# EAGLE board Proiect_TSC_BOARD (EAGLE 9.7.0)
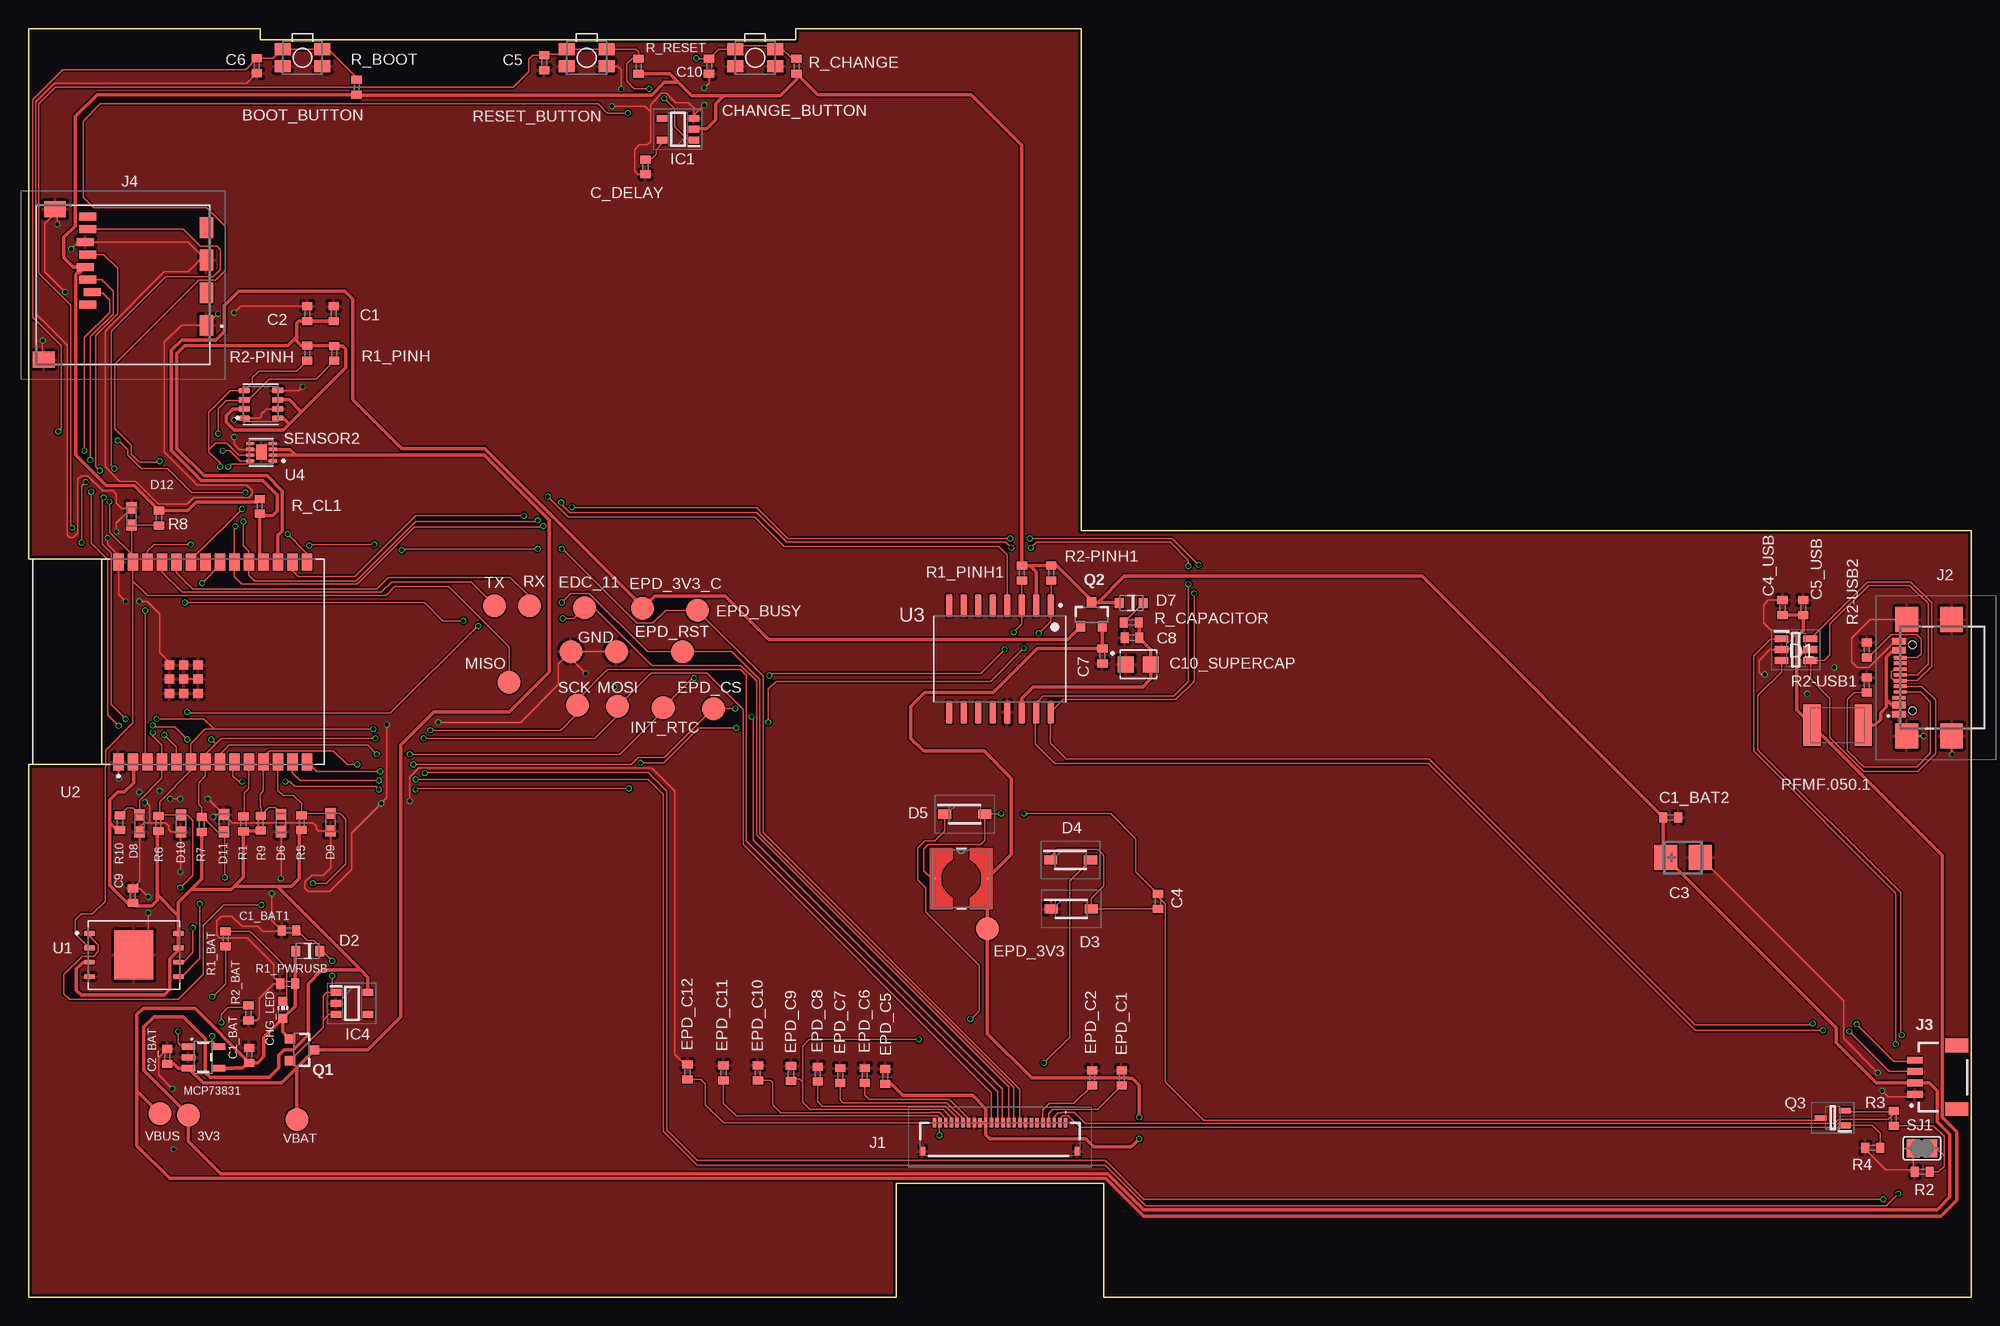
[diagram p0: board, top side]
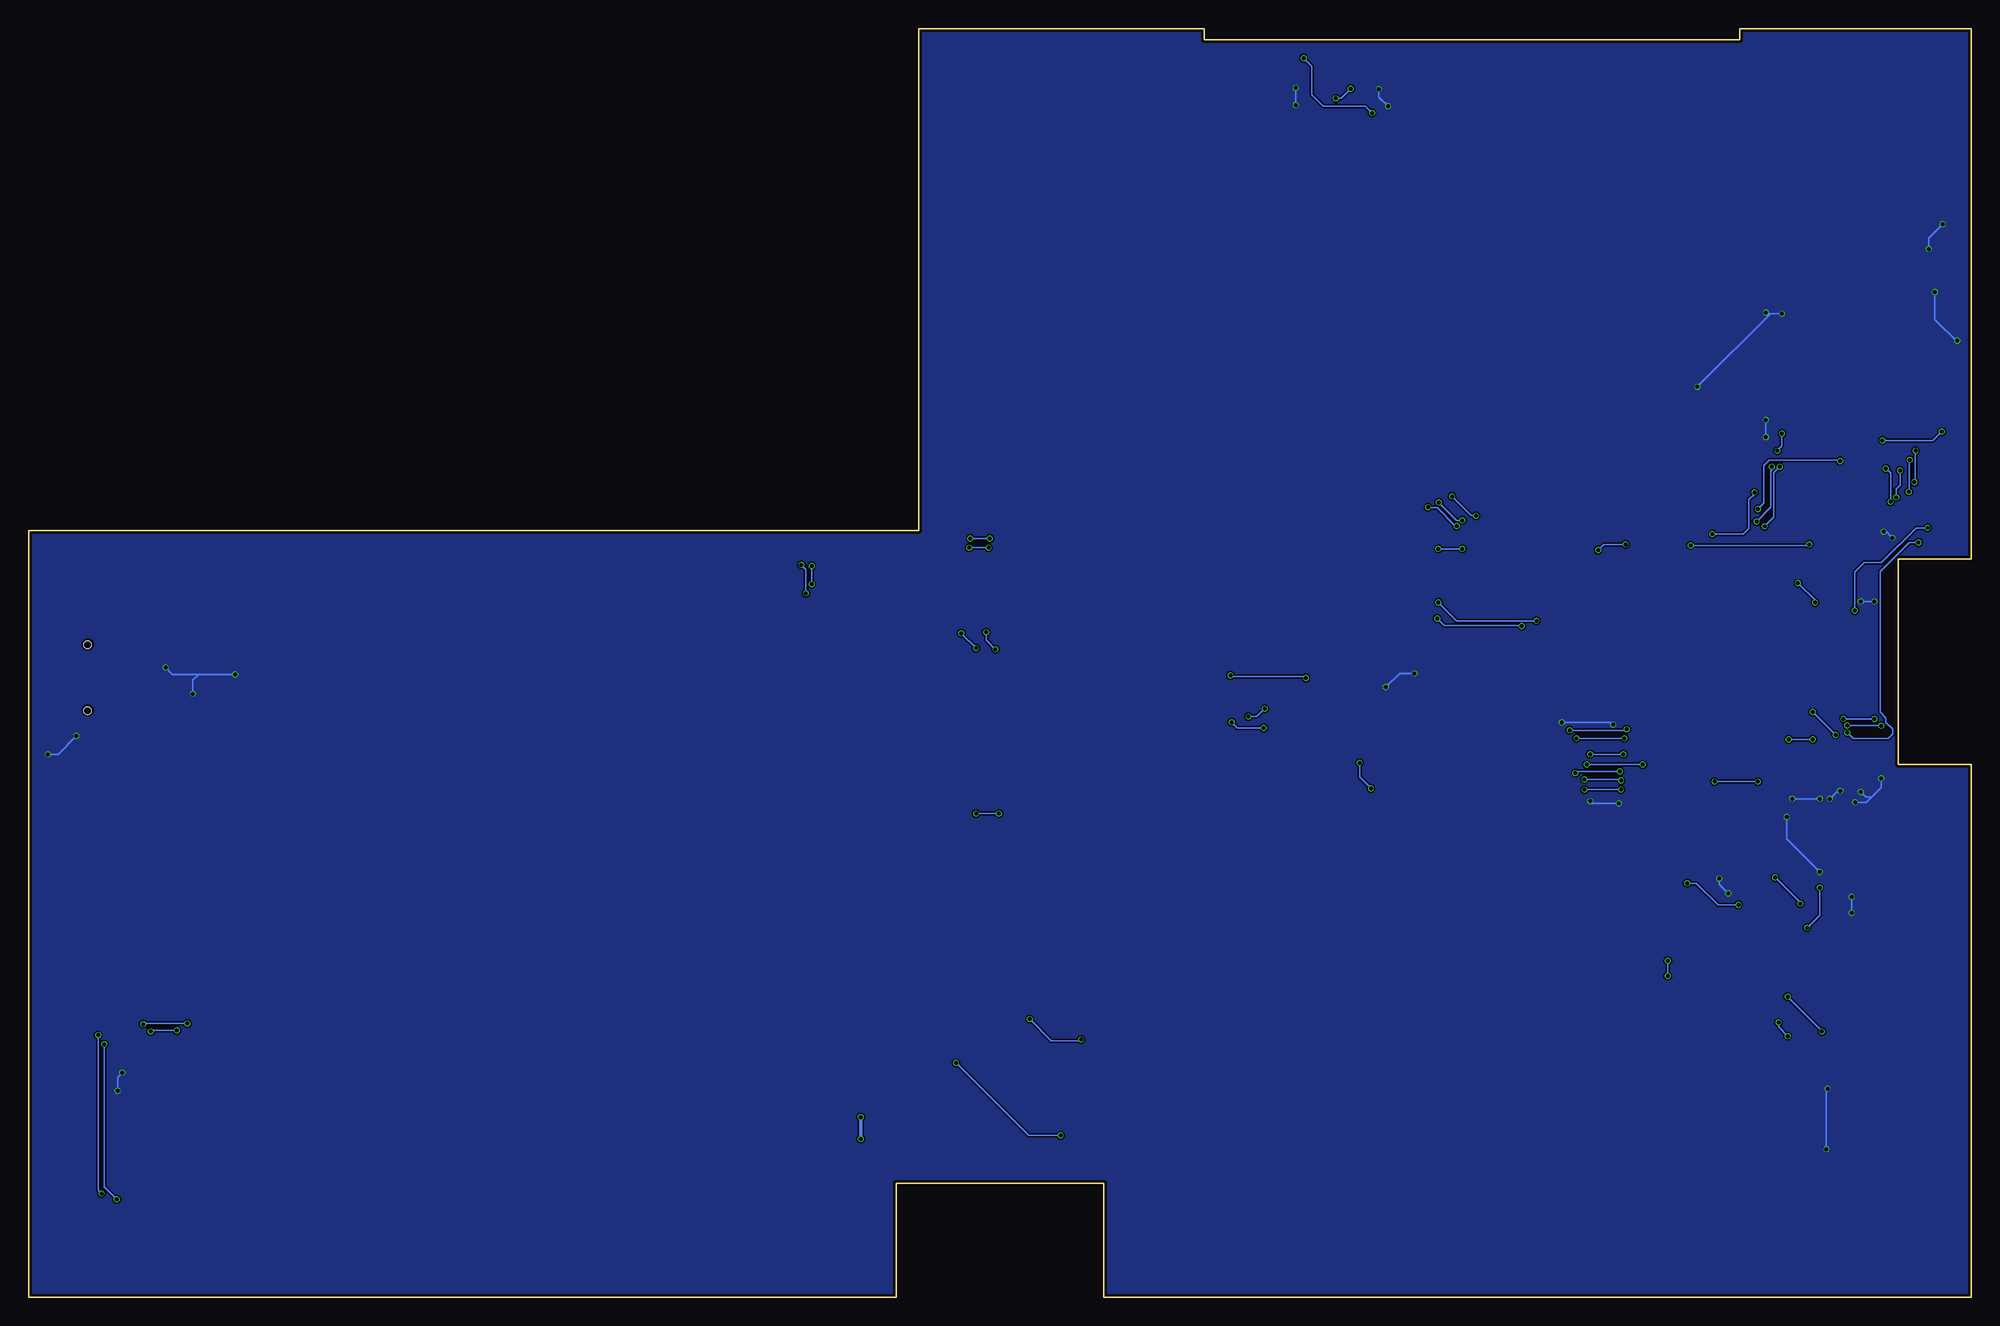
[diagram p1: board, bottom side, seen from below]

Size 170.2 x 111.2 mm. Coordinates in mm from the lower left corner, seen from the top.
Outline: 0,111.2 20.3,111.2 20.3,110.2 67.2,110.2 67.2,111.2 92.2,111.2 92.2,67.2 170.2,67.2 170.2,0 94.2,0 94.2,10 76,10 76,0 0,0 0,46.7 6.4,46.7 6.4,64.7 0,64.7 0,111.2
Copper layers (1*16): Top 0.035mm / dielectric 1.6mm / Bottom 0.035mm
Design rules "jlcpcb-2layers.dru *": minimum track width 5mil, minimum drill 0.3mm, track to track 5mil, track to pad 5mil, pad to pad 5mil, via to via 5mil, smd to smd 5mil, copper to edge 0.2mm, drill to drill 6mil, minimum pad ring 10mil, minimum via ring 3mil, stop-mask expansion 4mil, vias tented up to drill 0mil, thermal gap 10mil

## Footprints (pad centres in the part's own frame; a part is rotated, then mirrored left to right if it is on the bottom)
TP20R = smd 2 x 2: TP 0,0
MYBUTTON = smd 1.4 x 1.05: 1 1.75,0.75; 2 -1.75,0.75; 3 -1.75,-0.75; 4 1.75,-0.75
ESP32_WROVER_EAGLE-LTSPICE_C0402 = smd 0.7 x 0.9: 1 -0.65,0; 2 0.65,0
RCL_CT3528 = smd 2 x 2.2: + -1.5,0; - 1.5,0
EAGLE-LTSPICE_C0402 = smd 0.7 x 0.9: 1 -0.65,0; 2 0.65,0
CAPCP3225X100N = smd 1.4 x 1.4: 1 -1.1,0; 2 1.1,0
ADAFRUIT_CHIP-LED0603 = smd 0.8 x 0.8: A 0,-0.75; C 0,0.75
SOT95P280X145-6N = smd 1.2 x 0.6: 1 -1.25,0.95; 2 -1.25,0; 3 -1.25,-0.95; 4 1.25,-0.95; 5 1.25,0; 6 1.25,0.95
ESP32_WROVER_AVX---SD0805S020S1R0_AVX_SD0805S020S1R0_0 = smd 0.8 x 0.9: 1 -1.05,0; 2 1.05,0
SOD3716X135N = smd 1.15 x 0.8: 1 -1.75,0; 2 1.75,0
DIOC1608X36N = smd 0.97 x 0.94: 1 -0.75,0; 2 0.75,0
SOT95P280X125-5N = smd 0.9 x 0.6: 1 -1.4,0.95; 2 -1.4,0; 3 -1.4,-0.95; 4 1.4,-0.95; 5 1.4,0.95
SOT95P280X120-5N = smd 0.9 x 0.6: 1 -1.4,0.95; 2 -1.4,0; 3 -1.4,-0.95; 4 1.4,-0.95; 5 1.4,0.95
FH34SRJ24S05SH99 = smd 0.3 x 0.8: 1 5.75,1.45; 2 5.25,1.45; 3 4.75,1.45; 4 4.25,1.45; 5 3.75,1.45; 6 3.25,1.45; 7 2.75,1.45; 8 2.25,1.45; 9 1.75,1.45; 10 1.25,1.45; 11 0.75,1.45; 12 0.25,1.45; 13 -0.25,1.45; 14 -0.75,1.45; 15 -1.25,1.45; 16 -1.75,1.45; 17 -2.25,1.45; 18 -2.75,1.45; 19 -3.25,1.45; 20 -3.75,1.45; 21 -4.25,1.45; 22 -4.75,1.45; 23 -5.25,1.45; 24 -5.75,1.45 | smd 0.4 x 0.8: MP1 6.75,-1.05; MP2 -6.75,-1.05
SAMACSYS_PARTS_USB4110GFA = smd 0.3 x 1.143: A1 -3.35,3.778; A4 -2.55,3.778; A5 -1.25,3.678; A6 -0.25,3.678; A7 0.25,3.678; A8 1.25,3.678; A9 2.55,3.778; A12 3.35,3.778; B1 3.05,3.778; B4 2.25,3.778; B5 1.75,3.678; B6 0.75,3.678; B7 -0.75,3.678; B8 -1.75,3.778; B9 -2.25,3.778; B12 -3.05,3.778 | smd 2.18 x 2: MP1 -5.11,-0.827; MP2 5.11,-0.827; MP3 -5.11,3.103; MP4 5.11,3.103 | hole 0.65: -2.89,2.603; 2.89,2.603
JST04_1MM_RA = smd 0.6 x 1.35: 1 -1.5,0; 2 -0.5,0; 3 0.5,0; 4 1.5,0 | smd 1.2 x 2: NC1 2.8,-3.675; NC2 -2.8,-3.675
112ATAARR03ATTEND = smd 1.8 x 1.2: G1 10.6,10.4; G2 4.9,10.4; S1 7.75,10.4; S2 2.05,10.4 | smd 1.4 x 1.9: G3 13.6,-3.85; G4 0.45,-2.85 | smd 0.7 x 1.5: P1 8.8,0; P2 7.7,0.4; P3 6.6,0; P4 5.5,-0.2; P5 4.4,0; P6 3.3,-0.2; P7 2.2,0; P8 1.1,0
IND_4828-WE-TPC_WRE = smd 0.127 x 0.127: 1 -2.286,0; 2 2.286,0
ESP32_WROVER_SPARKFUN-IC-POWER_SOT23-5 = smd 0.55 x 1.2: 1 -0.95,-1.3; 2 0,-1.3; 3 0.95,-1.3; 4 0.95,1.3; 5 -0.95,1.3
ESP32C6_VARISTOR_CT/CN1812 = smd 1.5 x 3.6: 1 -2.25,0; 2 2.25,0
ESP32_WROVER_SPARKFUN-DISCRETESEMI_SOT23-3 = smd 0.8 x 0.9: 1 -0.95,-1; 2 0.95,-1; 3 0,1.1
SOT65P210X110-3N = smd 1.05 x 0.5: 1 -1.05,0.65; 2 -1.05,-0.65; 3 1.05,0
ESP32_WROVER_EAGLE-LTSPICE_R0402 = smd 0.7 x 0.9: 1 -0.65,0; 2 0.65,0
ESP32_WROVER_BME680_PSON80P300X300X100-8N = smd 1.016 x 0.5: 1 1.458,1.2; 2 1.458,0.4; 3 1.458,-0.4; 4 1.458,-1.2; 5 -1.458,-1.22; 6 -1.458,-0.4; 7 -1.458,0.4; 8 -1.458,1.2
SJ = smd 1.168 x 1.6: 1 -0.762,0; 2 0.762,0
SON127P600X800X80-9N = smd 0.94 x 0.44: 1 -3.895,1.905; 2 -3.895,0.635; 3 -3.895,-0.635; 4 -3.895,-1.905; 5 3.895,-1.905; 6 3.895,-0.635; 7 3.895,0.635; 8 3.895,1.905 | smd 3.4 x 4.3: 9 0,0
XCVR_ESP32-C6-WROOM-1-N8 = smd 1.5 x 0.9: 1 -8.75,5.26; 2 -8.75,3.99; 3 -8.75,2.72; 4 -8.75,1.45; 5 -8.75,0.18; 6 -8.75,-1.09; 7 -8.75,-2.36; 8 -8.75,-3.63; 9 -8.75,-4.9; 10 -8.75,-6.17; 11 -8.75,-7.44; 12 -8.75,-8.71; 13 -8.75,-9.98; 14 -8.75,-11.25; 15 8.75,-11.25; 16 8.75,-9.98; 17 8.75,-8.71; 18 8.75,-7.44; 19 8.75,-6.17; 20 8.75,-4.9; 21 8.75,-3.63; 22 8.75,-2.36; 23 8.75,-1.09; 24 8.75,0.18; 25 8.75,1.45; 26 8.75,2.72; 27 8.75,3.99; 28 8.75,5.26 | smd 0.8 x 0.8: 29_1 -2.755,0.79; 29_2 -1.505,0.79; 29_3 -0.255,0.79; 29_4 -2.755,-0.46; 29_5 -1.505,-0.46; 29_6 -0.255,-0.46; 29_7 -2.755,-1.71; 29_8 -1.505,-1.71; 29_9 -0.255,-1.71
SOIC127P1032X265-16N = smd 2.05 x 0.59: 1 -4.655,4.445; 2 -4.655,3.175; 3 -4.655,1.905; 4 -4.655,0.635; 5 -4.655,-0.635; 6 -4.655,-1.905; 7 -4.655,-3.175; 8 -4.655,-4.445; 9 4.655,-4.445; 10 4.655,-3.175; 11 4.655,-1.905; 12 4.655,-0.635; 13 4.655,0.635; 14 4.655,1.905; 15 4.655,3.175; 16 4.655,4.445
SON50P200X200X80-9N = smd 0.76 x 0.27: 1 -0.985,0.75; 2 -0.985,0.25; 3 -0.985,-0.25; 4 -0.985,-0.75; 5 0.985,-0.75; 6 0.985,-0.25; 7 0.985,0.25; 8 0.985,0.75 | smd 0.9 x 1.3: 9 0,0

## Placement (x,y rotation side)
3V3  TPTP20R  [TP20R]  14,16 0 top
BOOT_BUTTON  BUTTON_CUSYOMV1  [MYBUTTON]  24,108.65 180 top
C1  100nF  [ESP32_WROVER_EAGLE-LTSPICE_C0402]  26.73,86.23 90 top
C1_BAT  4.7uF  [ESP32_WROVER_EAGLE-LTSPICE_C0402]  19.34,21.23 90 top
C1_BAT1  4.7uF  [ESP32_WROVER_EAGLE-LTSPICE_C0402]  22.81,32.17 180 top
C1_BAT2  4.7uF  [ESP32_WROVER_EAGLE-LTSPICE_C0402]  143.85,42.07 0 top
C2  100nF  [ESP32_WROVER_EAGLE-LTSPICE_C0402]  24.41,86.23 90 top
C2_BAT  4.7uF  [ESP32_WROVER_EAGLE-LTSPICE_C0402]  12.15,21.13 90 top
C3  100uF  [RCL_CT3528]  144.93,38.55 0 top
C4  4.7uF/25V  [ESP32_WROVER_EAGLE-LTSPICE_C0402]  98.94,34.71 90 top
C4_USB  100nF  [EAGLE-LTSPICE_C0402]  153.65,60.45 90 top
C5  1uF  [ESP32_WROVER_EAGLE-LTSPICE_C0402]  45.17,108.21 270 top
C5_USB  4.7uF  [EAGLE-LTSPICE_C0402]  155.46,60.45 90 top
C6  100nF  [ESP32_WROVER_EAGLE-LTSPICE_C0402]  19.99,107.93 270 top
C7  10uF  [ESP32_WROVER_EAGLE-LTSPICE_C0402]  94.07,56.21 270 top
C8  100nF  [ESP32_WROVER_EAGLE-LTSPICE_C0402]  96.66,57.81 180 top
C9  100nF  [ESP32_WROVER_EAGLE-LTSPICE_C0402]  9.14,35.21 90 top
C10  100nF  [ESP32_WROVER_EAGLE-LTSPICE_C0402]  59.62,107.91 270 top
C10_SUPERCAP  CPH3225A  [CAPCP3225X100N]  97.22,55.47 0 top
C_DELAY  100nF  [ESP32_WROVER_EAGLE-LTSPICE_C0402]  54.04,99.07 270 top
CHANGE_BUTTON  CHANGE_BUTTON  [MYBUTTON]  63.65,108.65 180 top
CHG_LED  [ADAFRUIT_CHIP-LED0603]  22.28,25.2 0 top
D1  USBLC6-2SC6Y  [SOT95P280X145-6N]  154.82,56.77 0 top
D2  ESP32_WROVER_AVX---SD0805S020S1R0_AVX_SD0805S020S1R0_0_0AVX_SD0805S020S1R0_0_0  [ESP32_WROVER_AVX---SD0805S020S1R0_AVX_SD0805S020S1R0_0]  24.45,30.36 180 top
D3  MBR0530  [SOD3716X135N]  91.34,34.05 0 top
D4  MBR0530  [SOD3716X135N]  91.28,38.35 0 top
D5  MBR0530  [SOD3716X135N]  82.02,42.35 0 top
D6  PGB1010603MR  [DIOC1608X36N]  22.12,41.57 90 top
D7  SD0805S020S1R0  [ESP32_WROVER_AVX---SD0805S020S1R0_AVX_SD0805S020S1R0_0]  96.6,60.86 180 top
D8  PGB1010603MR  [DIOC1608X36N]  9.72,41.55 90 top
D9  PGB1010603MR  [DIOC1608X36N]  26.46,41.65 90 top
D10  PGB1010603MR  [DIOC1608X36N]  13.35,41.54 90 top
D11  PGB1010603MR  [DIOC1608X36N]  17.12,41.56 270 top
D12  PGB1010603MR  [DIOC1608X36N]  9.03,68.45 270 top
EDC_11  TPTP20R  [TP20R]  48.7,60.43 0 top
EPD_3V3  TPTP20R  [TP20R]  84,32.3 0 top
EPD_3V3_C  TPTP20R  [TP20R]  53.8,60.4 0 top
EPD_BUSY  TPTP20R  [TP20R]  58.6,60.2 0 top
EPD_C1  1uF/50V  [ESP32_WROVER_EAGLE-LTSPICE_C0402]  95.77,19.25 89.9 top
EPD_C2  1uF/50V  [ESP32_WROVER_EAGLE-LTSPICE_C0402]  93.18,19.25 90 top
EPD_C5  0.1uF/50V  [ESP32_WROVER_EAGLE-LTSPICE_C0402]  75.05,19.39 270 top
EPD_C6  1uF/50V  [ESP32_WROVER_EAGLE-LTSPICE_C0402]  73.25,19.45 90 top
EPD_C7  1uF/50V  [ESP32_WROVER_EAGLE-LTSPICE_C0402]  71.1,19.45 89.8 top
EPD_C8  1uF/50V  [ESP32_WROVER_EAGLE-LTSPICE_C0402]  69.13,19.57 90 top
EPD_C9  1uF/50V  [ESP32_WROVER_EAGLE-LTSPICE_C0402]  66.79,19.63 90.4 top
EPD_C10  1uF/50V  [ESP32_WROVER_EAGLE-LTSPICE_C0402]  63.89,19.67 90 top
EPD_C11  1uF/50V  [ESP32_WROVER_EAGLE-LTSPICE_C0402]  60.88,19.7 90 top
EPD_C12  1uF/50V  [ESP32_WROVER_EAGLE-LTSPICE_C0402]  57.73,19.77 90 top
EPD_CS  TPTP20R  [TP20R]  60,51.6 0 top
EPD_RST  TPTP20R  [TP20R]  57.3,56.6 0 top
GND  TPTP20R  [TP20R]  51.5,56.6 0 top
IC1  BD5229G-TR  [SOT95P280X125-5N]  56.89,102.37 180 top
IC4  XC6220A331MR-G  [SOT95P280X120-5N]  28.33,25.77 0 top
INT_RTC  TPTP20R  [TP20R]  55.6,51.7 0 top
J1  FH34SRJ-24S-0.5SH_99_  [FH34SRJ24S05SH99]  85.1,13.87 0 top
J2  SAMACSYS_PARTS_USB4110-GF-A  [SAMACSYS_PARTS_USB4110GFA]  167.63,54.31 90 top
J3  QWIIC_RIGHT_ANGLE  [JST04_1MM_RA]  165.25,19.3 90 top
J4  112A-TAAR-R03_ATTEND  [112ATAARR03ATTEND]  5.18,95.8 270 top
L1  68uH  [IND_4828-WE-TPC_WRE]  81.71,36.7 0 top
MCP73831  MCP73831  [ESP32_WROVER_SPARKFUN-IC-POWER_SOT23-5]  15.31,21.04 270 top
MISO  TPTP20R  [TP20R]  42.1,53.9 0 top
MOSI  TPTP20R  [TP20R]  51.6,51.8 0 top
PFMF.050.1  ESP32C6_VARISTORCN1812  [ESP32C6_VARISTOR_CT/CN1812]  158.48,50.15 180 top
Q1  20V/4.2A/52mΩ/1.4W  [ESP32_WROVER_SPARKFUN-DISCRETESEMI_SOT23-3]  23.9,21.71 270 top
Q2  20V/4.2A/52mΩ/1.4W  [ESP32_WROVER_SPARKFUN-DISCRETESEMI_SOT23-3]  93.12,59.81 0 top
Q3  SI1308EDL-T1-GE3  [SOT65P210X110-3N]  158.05,15.73 180 top
R1  10K  [ESP32_WROVER_EAGLE-LTSPICE_R0402]  18.83,41.51 270 top
R1_BAT  200  [ESP32_WROVER_EAGLE-LTSPICE_R0402]  17.26,31.43 270 top
R1_PINH  10K  [ESP32_WROVER_EAGLE-LTSPICE_R0402]  26.79,82.73 90 top
R1_PINH1  10K  [ESP32_WROVER_EAGLE-LTSPICE_R0402]  87.02,63.49 90 top
R1_PWRUSB  100K  [ESP32_WROVER_EAGLE-LTSPICE_R0402]  22.71,27.49 0 top
R2  2.2  [ESP32_WROVER_EAGLE-LTSPICE_R0402]  165.89,11.01 0 top
R2-PINH  10K  [ESP32_WROVER_EAGLE-LTSPICE_R0402]  24.42,82.75 90 top
R2-PINH1  10K  [ESP32_WROVER_EAGLE-LTSPICE_R0402]  89.58,63.49 90 top
R2-USB1  5k1  [ESP32_WROVER_EAGLE-LTSPICE_R0402]  161.03,53.67 270 top
R2-USB2  5k1  [ESP32_WROVER_EAGLE-LTSPICE_R0402]  161.02,56.75 90 top
R2_BAT  2K  [ESP32_WROVER_EAGLE-LTSPICE_R0402]  19.27,24.93 90 top
R3  0.47  [ESP32_WROVER_EAGLE-LTSPICE_R0402]  163.39,15.71 90 top
R4  10K  [ESP32_WROVER_EAGLE-LTSPICE_R0402]  161.55,13.11 0 top
R5  10K  [ESP32_WROVER_EAGLE-LTSPICE_R0402]  23.92,41.61 270 top
R6  10K  [ESP32_WROVER_EAGLE-LTSPICE_R0402]  11.37,41.55 270 top
R7  10K  [ESP32_WROVER_EAGLE-LTSPICE_R0402]  15.17,41.46 270 top
R8  10K  [ESP32_WROVER_EAGLE-LTSPICE_R0402]  11.43,68.31 90 top
R9  10K  [ESP32_WROVER_EAGLE-LTSPICE_R0402]  20.35,41.57 270 top
R10  10K  [ESP32_WROVER_EAGLE-LTSPICE_R0402]  8.01,41.61 270 top
R_BOOT  10K  [ESP32_WROVER_EAGLE-LTSPICE_R0402]  28.74,106.05 270 top
R_CAPACITOR  15  [ESP32_WROVER_EAGLE-LTSPICE_R0402]  96.59,59.15 180 top
R_CHANGE  10K  [ESP32_WROVER_EAGLE-LTSPICE_R0402]  67.28,107.89 270 top
R_CL1  10K  [ESP32_WROVER_EAGLE-LTSPICE_R0402]  20.25,69.33 90 top
R_RESET  10K  [ESP32_WROVER_EAGLE-LTSPICE_R0402]  53.44,107.89 270 top
RESET_BUTTON  BUTTON_CUSYOMV1  [MYBUTTON]  48.9,108.65 180 top
RX  TPTP20R  [TP20R]  43.9,60.6 0 top
SCK  TPTP20R  [TP20R]  48.1,51.9 0 top
SENSOR2  BME688  [ESP32_WROVER_BME680_PSON80P300X300X100-8N]  20.36,78.27 180 top
SJ1  0  [SJ]  165.86,13.07 0 top
TP5  TPTP20R  [TP20R]  47.5,56.6 0 top
TX  TPTP20R  [TP20R]  40.8,60.6 0 top
U1  W25Q512JVEIQ  [SON127P600X800X80-9N]  9.23,30.01 0 top
U2  ESP32-C6-WROOM-1-N8  [XCVR_ESP32-C6-WROOM-1-N8]  13.14,55.69 90 top
U3  DS3231SN#  [SOIC127P1032X265-16N]  85.09,55.95 270 top
U4  MAX17048G+T10  [SON50P200X200X80-9N]  20.4,74.07 180 top
VBAT  TPTP20R  [TP20R]  23.5,15.6 0 top
VBUS  TPTP20R  [TP20R]  11.5,16.1 0 top

## Library data of the parts
3V3 BOOT_BUTTON CHANGE_BUTTON CHG_LED EDC_11 EPD_3V3 EPD_3V3_C EPD_BUSY EPD_CS EPD_RST GND INT_RTC MISO MOSI PFMF.050.1 RESET_BUTTON RX SCK SJ1 TP5 TX VBAT VBUS = DeskAssistant_v19_v1_up
C1 C1_BAT C1_BAT1 C1_BAT2 C2 C2_BAT C4 C4_USB C5 C5_USB C6-C10 C_DELAY EPD_C1 EPD_C2 EPD_C5-EPD_C12 = DeskAssistant_v19_v1_up; SPICEMODEL: NONE; SPICEPREFIX: C
C3 = DeskAssistant_v19_v1_up; SPICEPREFIX: C
C10_SUPERCAP = DeskAssistant_v19_v1_up; AVAILABILITY: Not in stock; CHECK_PRICES: https://www.snapeda.com/parts/CPH3225A/Seiko+Instruments/view-part/?ref=eda; DESCRIPTION: 11 mF (EDLC) Supercapacitor 3.3 V 1210 (3225 Metric) - -; MF: Seiko Instruments; MP: CPH3225A; PACKAGE: 1210 Seiko; PRICE: None; PURCHASE-URL: https://www.snapeda.com/api/url_track_click_mouser/?unipart_id=562593&manufacturer=Seiko Instruments&part_name=CPH3225A&search_term=None; SNAPEDA_LINK: https://www.snapeda.com/parts/CPH3225A/Seiko+Instruments/view-part/?ref=snap
D1 = DeskAssistant_v19_v1_up; AVAILABILITY: In Stock; CHECK_PRICES: https://www.snapeda.com/parts/USBLC6-2SC6Y/STMicroelectronics/view-part/?ref=eda; DESCRIPTION: 17V Clamp 5A (8/20µs) Ipp Tvs Diode Surface Mount SOT-23-6; MF: STMicroelectronics; MP: USBLC6-2SC6Y; PACKAGE: SOT-23-6 STMicroelectronics; PRICE: None; SNAPEDA_LINK: https://www.snapeda.com/parts/USBLC6-2SC6Y/STMicroelectronics/view-part/?ref=snap
D2 D7 = DeskAssistant_v19_v1_up; CENTROID_NOT_SPECIFIED: No; DATASHEET: http://datasheets.avx.com/schottky.pdf; DIGIKEY_DESCRIPTION: DIODE SCHOTTKY 20V 1A 0805; DIGIKEY_PART_NUMBER: 478-7800-1-ND; LEAD_FREE: yes; MF: AVX; MOUSER_PART_NUMBER: 581-SD0805S020S1R0; PACKAGE: 0805 (2012 metric); PREFIX: D; ROHS: yes; TEMPERATURE_RANGE_HIGH: +125°C; TEMPERATURE_RANGE_LOW: -55°C
D3-D5 = DeskAssistant_v19_v1_up; AVAILABILITY: In Stock; CHECK_PRICES: https://www.snapeda.com/parts/MBR0530/Onsemi/view-part/?ref=eda; DESCRIPTION: Diode Schottky 30 V 500mA Surface Mount SOD-123; MF: ON Semiconductor; MP: MBR0530; PACKAGE: SOD-123-2 ON Semiconductor; PRICE: None; PURCHASE-URL: https://www.snapeda.com/api/url_track_click_mouser/?unipart_id=179458&manufacturer=ON Semiconductor&part_name=MBR0530&search_term=None; SNAPEDA_LINK: https://www.snapeda.com/parts/MBR0530/Onsemi/view-part/?ref=snap
D6 D8-D12 = DeskAssistant_v19_v1_up; AVAILABILITY: In Stock; CHECK_PRICES: https://www.snapeda.com/parts/PGB1010603MR/Littelfuse/view-part/?ref=eda; DESCRIPTION: 150V (Typ) Clamp - Ipp Tvs Diode Surface Mount 0603 (1608 Metric); MF: Littelfuse Inc.; MP: PGB1010603MR; PACKAGE: 0603 Littelfuse Inc.; PRICE: None; PURCHASE-URL: https://www.snapeda.com/api/url_track_click_mouser/?unipart_id=5659453&manufacturer=Littelfuse Inc.&part_name=PGB1010603MR&search_term=None; SNAPEDA_LINK: https://www.snapeda.com/parts/PGB1010603MR/Littelfuse/view-part/?ref=snap
IC1 = DeskAssistant_v19_v1_up; DESCRIPTION: Voltage Detector with Adjustable Delay Time: CMOS processes are utilized to develop high precision, low current consumption CMOS reset ICs that allow arbitrary setting of the delay time. The extensive lineup includes both Nch Open Drain and CMOS output types in a wide range of detection voltages (from 2.3V to 6.0V, in 0.1V steps), enabling selection of the ideal solution based on customer requirements. In addition, the entire series is of course both lead-free and RoHS-compliant.; HEIGHT: 1.25mm; MANUFACTURER_NAME: ROHM Semiconductor; MANUFACTURER_PART_NUMBER: BD5229G-TR; MOUSER_PART_NUMBER: 755-BD5229G-TR; MOUSER_PRICE-STOCK: https://www.mouser.co.uk/ProductDetail/ROHM-Semiconductor/BD5229G-TR?qs=4kLU8WoGk0vvnhrrYwdszw%3D%3D
IC4 = DeskAssistant_v19_v1_up; DESCRIPTION: LDO Voltage Regulators; HEIGHT: 1.2mm; MANUFACTURER_NAME: Torex; MANUFACTURER_PART_NUMBER: XC6220A331MR-G; MOUSER_PART_NUMBER: 865-XC6220A331MR-G; MOUSER_PRICE-STOCK: https://www.mouser.co.uk/ProductDetail/Torex-Semiconductor/XC6220A331MR-G?qs=AsjdqWjXhJ8ZSWznL1J0gg%3D%3D
J1 = DeskAssistant_v19_v1_up; DESCRIPTION: 24 Position FFC, FPC Connector Contacts, Top and Bottom 0.020" (0.50mm) Surface Mount, Right Angle; HEIGHT: 1.1mm; MANUFACTURER_NAME: Hirose; MANUFACTURER_PART_NUMBER: FH34SRJ-24S-0.5SH(99); MOUSER_PART_NUMBER: 798-FH34SRJ24S05SH99; MOUSER_PRICE-STOCK: https://www.mouser.co.uk/ProductDetail/Hirose-Connector/FH34SRJ-24S-0.5SH99?qs=vcbW%252B4%252BSTIpKBl5ap9J8Fw%3D%3D
J2 = DeskAssistant_v19_v1_up; DESCRIPTION: CONN USB 2.0 TYPE-C R/A SMT; HEIGHT: 3.26mm; MANUFACTURER_NAME: GCT (GLOBAL CONNECTOR TECHNOLOGY); MANUFACTURER_PART_NUMBER: USB4110-GF-A; MOUSER_PART_NUMBER: 640-USB4110-GF-A; MOUSER_PRICE-STOCK: https://www.mouser.co.uk/ProductDetail/GCT/USB4110-GF-A?qs=KUoIvG%2F9IlYiZvIXQjyJeA%3D%3D
J3 = DeskAssistant_v19_v1_up; PROD_ID: CONN-13694
J4 = DeskAssistant_v19_v1_up; DESCRIPTION: Micro SD Card Socket, Push-Push Type, Top Mount, SMT, H=1.83mm, 10u; HEIGHT: 1.9mm; MANUFACTURER_NAME: ATTEND; MANUFACTURER_PART_NUMBER: 112A-TAAR-R03 ATTEND
L1 = DeskAssistant_v19_v1_up; COPYRIGHT: Copyright (C) 2024 Ultra Librarian. All rights reserved.; MANUFACTURER_PART_NUMBER: 744043680; MFR_NAME: Wurth Electronics
MCP73831 = DeskAssistant_v19_v1_up; PROD_ID: IC-09995
Q1 Q2 = DeskAssistant_v19_v1_up; PROD_ID: TRAN-14388
Q3 = DeskAssistant_v19_v1_up; AVAILABILITY: In Stock; CHECK_PRICES: https://www.snapeda.com/parts/SI1308EDL-T1-GE3/Vishay+Siliconix/view-part/?ref=eda; DESCRIPTION: Si1308EDL-T1-GE3 N-channel MOSFET Transistor, 1.5 A, 30 V, 3-Pin SC-70 | Siliconix / Vishay SI1308EDL-T1-GE3; MF: Vishay Siliconix; MP: SI1308EDL-T1-GE3; PACKAGE: SOT-323 Vishay Semiconductor; PRICE: None; PURCHASE-URL: https://www.snapeda.com/api/url_track_click_mouser/?unipart_id=274603&manufacturer=Vishay Siliconix&part_name=SI1308EDL-T1-GE3&search_term=None; SNAPEDA_LINK: https://www.snapeda.com/parts/SI1308EDL-T1-GE3/Vishay+Siliconix/view-part/?ref=snap
R1 R1_BAT R1_PINH R1_PINH1 R1_PWRUSB R2 R2-PINH R2-PINH1 R2-USB1 R2-USB2 R2_BAT R3-R10 R_BOOT R_CAPACITOR R_CHANGE R_CL1 R_RESET = DeskAssistant_v19_v1_up; SPICEMODEL: NONE; SPICEPREFIX: R
SENSOR2 = DeskAssistant_v19_v1_up; AVAILABILITY: Unavailable; DESCRIPTION: Integrated Environmental Unit; MF: Bosch Sensortec; MP: BME680; PACKAGE: LGA-8 Bosch Tools; PRICE: None
U1 = DeskAssistant_v19_v1_up; AVAILABILITY: In Stock; CHECK_PRICES: https://www.snapeda.com/parts/W25Q512JVEIQ/Winbond+Electronics/view-part/?ref=eda; DESCRIPTION: FLASH - NOR Memory IC 512Mb (64M x 8) SPI - Quad I/O 133 MHz 8-WSON (8x6); MF: Winbond Electronics; MP: W25Q512JVEIQ; PACKAGE: Package; PRICE: None; SNAPEDA_LINK: https://www.snapeda.com/parts/W25Q512JVEIQ/Winbond+Electronics/view-part/?ref=snap
U2 = DeskAssistant_v19_v1_up; AVAILABILITY: In Stock; CHECK_PRICES: https://www.snapeda.com/parts/ESP32-C6-WROOM-1-N8/Espressif+Systems/view-part/?ref=eda; DESCRIPTION: Multiprotocol Modules ESP32-C6 module, Wi-Fi 6 in 2.4 GHz band, Bluetooth 5, Zigbee 3.0 and Thread. ESP34-WROOM Compatible - ENGINEERING SAMPLE; MF: Espressif Systems; MP: ESP32-C6-WROOM-1-N8; PACKAGE: None; PRICE: None; SNAPEDA_LINK: https://www.snapeda.com/parts/ESP32-C6-WROOM-1-N8/Espressif+Systems/view-part/?ref=snap
U3 = DeskAssistant_v19_v1_up; AVAILABILITY: In Stock; CHECK_PRICES: https://www.snapeda.com/parts/DS3231SN%23/Analog+Devices/view-part/?ref=eda; DESCRIPTION: Extremely Accurate I²C-Integrated RTC/TCXO/Crystal; MF: Analog Devices; MP: DS3231SN#; PACKAGE: SOIC-16 Maxim; PRICE: None; PURCHASE-URL: https://www.snapeda.com/api/url_track_click_mouser/?unipart_id=99048&manufacturer=Analog Devices&part_name=DS3231SN#&search_term=None; SNAPEDA_LINK: https://www.snapeda.com/parts/DS3231SN%23/Analog+Devices/view-part/?ref=snap
U4 = DeskAssistant_v19_v1_up; AVAILABILITY: In Stock; CHECK_PRICES: https://www.snapeda.com/parts/MAX17048G+T10/Analog+Devices/view-part/?ref=eda; DESCRIPTION: 3µA 1-Cell/2-Cell Fuel Gauge with ModelGauge; MF: Analog Devices; MP: MAX17048G+T10; PACKAGE: TDFN-8 Maxim; PRICE: None; PURCHASE-URL: https://www.snapeda.com/api/url_track_click_mouser/?unipart_id=329239&manufacturer=Analog Devices&part_name=MAX17048G+T10&search_term=None; SNAPEDA_LINK: https://www.snapeda.com/parts/MAX17048G+T10/Analog+Devices/view-part/?ref=snap

## Nets
3V3: 3V3.TP C1_BAT2.1 C3.+ C9.1 D7.2 IC1.2 IC4.5 J3.2 J4.P4 Q2.3 R1.2 R1_PINH1.2 R2-PINH1.2 R5.2 R6.2 R7.2 R8.2 R9.2 R10.2 R_BOOT.2 R_CHANGE.2 R_CL1.2 R_RESET.2 U1.3 U1.7 U1.8 U2.2 U3.2
32KHZ: R2-PINH1.1 U2.9 U3.1
DN: D1.4 J2.A7 J2.B7
DP: D1.6 J2.A6 J2.B6
EPD_3V3: C7.1 EPD_3V3.TP EPD_C5.2 J1.15 J1.16 L1.2 Q2.2
EPD_3V3_C: EPD_3V3_C.TP Q2.1 R_CL1.1 U2.18
EPD_BUSY: EPD_BUSY.TP J1.9 U2.26
EPD_CS: D6.2 EPD_CS.TP J1.12 R9.1 U2.11
EPD_DC: EDC_11.TP J1.11 U2.5
EPD_RST: EPD_RST.TP J1.10 U2.21
FLASH_CS: D9.2 R5.1 U1.1 U2.12
GDR: J1.2 Q3.1 R4.2
GND: BOOT_BUTTON.1 BOOT_BUTTON.2 C1.2 C1_BAT1.2 C1_BAT2.2 C1_BAT.2 C2.2 C2_BAT.2 C3.- C4_USB.2 C5.2 C5_USB.2 C6.2 C7.2 C8.2 C9.2 C10.2 C10_SUPERCAP.1 C_DELAY.2 CHANGE_BUTTON.1 CHANGE_BUTTON.2 D1.2 D3.1 D6.1 D8.1 D9.1 D10.1 D11.1 D12.1 EPD_C1.2 EPD_C2.2 EPD_C5.1 EPD_C6.2 EPD_C7.2 EPD_C8.2 EPD_C9.2 EPD_C10.2 EPD_C11.2 EPD_C12.2 GND.TP IC1.3 IC4.2 J1.8 J1.17 J1.MP1 J1.MP2 J2.A1 J2.A12 J2.B1 J2.B12 J2.MP1 J2.MP2 J2.MP3 J2.MP4 J3.1 J4.G1 J4.G2 J4.G3 J4.G4 J4.P6 MCP73831.2 R1_PWRUSB.1 R2-USB1.1 R2-USB2.2 R2.1 R2_BAT.1 R4.1 RESET_BUTTON.1 RESET_BUTTON.2 SENSOR2.1 SENSOR2.5 SENSOR2.7 SJ1.1 TP5.TP U1.4 U1.9 U2.1 U2.28 U2.29_1 U2.29_2 U2.29_3 U2.29_4 U2.29_5 U2.29_6 U2.29_7 U2.29_8 U2.29_9 U3.13 U4.1 U4.4 U4.6 U4.9
GPIO8: R1.1 U2.10
I2C_PW: C1.1 C2.1 R1_PINH.2 R2-PINH.2 SENSOR2.2 SENSOR2.6 SENSOR2.8 U2.17
INT_RTC: INT_RTC.TP R1_PINH1.1 U2.8 U3.3
IO/BOOT: BOOT_BUTTON.3 BOOT_BUTTON.4 C6.1 R_BOOT.1 U2.15
IO/CHANGE: C10.1 CHANGE_BUTTON.3 CHANGE_BUTTON.4 R_CHANGE.1 U2.23
MISO: D12.2 J4.P7 MISO.TP R8.1 U1.2 U2.27
MOSI: D11.2 J1.14 J4.P3 MOSI.TP R7.1 U1.5 U2.7
N$1: J2.A5 R2-USB1.2
N$3: J2.B5 R2-USB2.1
N$12: C1_BAT1.1 D2.1 IC4.1 IC4.3 Q1.2
N$17: C4.1 D3.2 D4.1
N$22: CHG_LED.C R1_BAT.1
N$23: MCP73831.1 R1_BAT.2
N$25: MCP73831.5 R2_BAT.2
N$28: EPD_C1.1 J1.4
N$29: EPD_C2.1 J1.5
N$37: EPD_C6.1 J1.18
N$38: EPD_C7.1 J1.19
N$39: EPD_C8.1 J1.20
N$41: EPD_C10.1 J1.22
N$43: EPD_C12.1 J1.24
N$56: C_DELAY.1 IC1.5
N$68: D7.1 R_CAPACITOR.2
PREVGH: D5.1 EPD_C9.1 J1.21
PREVGL: D4.2 EPD_C11.1 J1.23
RESE: J1.3 Q3.2 R3.2
RESE': R2.2 R3.1 SJ1.2
RESET: C5.1 IC1.1 R_RESET.1 RESET_BUTTON.3 RESET_BUTTON.4 U2.3
RTC_RST: U2.16 U3.4
RX: RX.TP U2.24
SCK: D10.2 J1.13 J4.P5 R6.1 SCK.TP U1.6 U2.6
SCL: J3.4 R2-PINH.1 SENSOR2.4 U2.20 U3.16 U4.7
SDA: J3.3 R1_PINH.1 SENSOR2.3 U2.19 U3.15 U4.8
SRC: C4.2 D5.2 L1.1 Q3.3
SS_SD: D8.2 J4.P2 R10.1 U2.4
TX: TX.TP U2.25
USB_D+: D1.1 U2.14
USB_D-: D1.3 U2.13
VBAT: C2_BAT.1 MCP73831.3 Q1.3 U4.2 U4.3 VBAT.TP
VBUS: C1_BAT.1 C4_USB.1 C5_USB.1 CHG_LED.A D1.5 D2.2 MCP73831.4 PFMF.050.1.2 Q1.1 R1_PWRUSB.2 VBUS.TP
VRTC: C8.1 C10_SUPERCAP.2 R_CAPACITOR.1 U3.14
VUSB: J2.A4 J2.A9 J2.B4 J2.B9 PFMF.050.1.1

## Tracks (layer width: path | path; a pad name or v marks a point on that pad's centre or on a via)
3V3
  Top 0.3: U1.8 13.12,31.01 | U1.8 13.12,33.4 13.12,33.45 | 13.12,33.45 13.12,34.62 14.27,35.77 | U1.8 U1.7 13.12,30.43 12.38,29.68 12.38,26.98 11.9,26.5 4.6,26.5 4.2,26.9 4.2,28.8 4.77,29.38 U1.3 | 7.1,41.6 7.1,43.6 7.8,44.3 8.4,44.3 9.2,45.1 9.2,46.89 U2.2 | 7.1,41.6 7.1,36.1 8.64,34.56 C9.1 9.4,34.3 10.8,34.3 11.27,34.77 11.27,35.3 | R7.2 15.17,36.67 14.27,35.77 | 18,36 18.83,36.83 R1.2 18.83,40.9 20.33,40.9 R9.2 | R5.2 23.7,40.74 23.7,36.7 23,36 21.8,36 | R10.2 7.74,40.96 7.1,41.6 | 14.27,35.77 17.77,35.77 18,36 | 56.9,106.5 58.1,105.3 60.9,105.3 | 56.9,106.5 56.16,107.24 R_RESET.2 | 87.7,64.14 R1_PINH1.2 87.02,100.98 82.6,105.4 69.12,105.4 R_CHANGE.2 67.28,106.74 65.84,105.3 60.9,105.3 | 87.7,64.14 R2-PINH1.2 90.08,64.14 93.22,61 Q2.3 93.7,60.91 | U3.2 88.27,63.58 87.7,64.14 | 93.7,60.91 95.5,60.91 D7.2 | 93.7,60.91 95.99,63.2 122.07,63.2 C1_BAT2.1 143.2,38.78 C3.+ 158.35,23.63 158.35,22.33 161.88,18.8 J3.2 166.52,18.8 167.2,18.12 167.2,15.4 168.3,14.3 168.3,8.8 167.2,7.7 97.71,7.7 94.55,10.85 16.85,10.85 14,13.7 3V3.TP 10.1,19.9 10.1,23.7 11,24.6 13.57,24.6 15.5,22.67 15.5,19.7 15.9,19.3 21.1,19.3 21.9,20.1 21.9,21.2 22.4,21.7 23.2,21.7 24.5,23 24.5,27.5 25.7,28.7 29.1,28.7 | 29.1,28.7 29.73,28.07 IC4.5 29.73,26.77 | 29.1,28.7 21.8,36 | 21.8,36 18,36 | R_CL1.2 19.97,69.7 14.67,69.7 13.93,68.96 R8.2 9.24,71.15 6.81,71.15 4.15,73.81 4.15,89.67 4.31,89.83 4.51,89.83 J4.P4 3.9,90.3 3.1,91.1 3.1,92.9 4.1,93.9 4.1,103.5 6,105.4 R_BOOT.2 28.76,105.37 54.57,105.37 55.7,106.5 56.9,106.5 | IC1.2 58.32,102.4 59.4,102.4 60.2,103.2 60.2,104.6 60.9,105.3 | 11.27,35.3 11.27,40.8 R6.2
  Top 0.3: 11.27,35.3 13.12,33.45
32KHZ  (via drill 0.35)
  Top 0.152: R2-PINH1.1 89.58,60.65 U3.1 89.53,59.23 v88.5,58.2 | v52.6,44.6 34,44.6 v33.9,44.5 | v30.7,44.5 30.4,44.8 23.3,44.8 22.9,45.2 v22.5,45.2 | v18.7,45.2 18.4,45.2 17.9,45.7 17.9,46.8 U2.9 | v87.2,56.9 84.3,54 65.5,54 64.8,53.3 v64.8,50.4 | v62,49.9 58.69,49.9 55.65,46.85 v53.6,46.85
  Bottom 0.152: v33.9,44.5 v30.7,44.5 | v22.5,45.2 v18.7,45.2 | v88.5,58.2 v87.2,56.9 | v64.8,50.4 64.3,49.9 v62,49.9 | v52.6,44.6 53.6,45.6 v53.6,46.85
DN
  Top 0.152: J2.A7 165.46,54.56 166.4,55.5 166.4,60.8 164.8,62.4 161.2,62.4 157.8,59 157.8,56.3 157.32,55.82 D1.4 156.1,55.79 156.1,54.2 157.8,52.5 157.8,49.08 160.78,46.1 165.5,46.1 167.05,47.65 167.05,52.35 165.84,53.56 J2.B7
DP
  Top 0.152: D1.6 161.05,62.7 164.9,62.7 166.7,60.9 166.7,55.3 165.46,54.06 J2.A6 163.44,54.06 163.18,54.33 163.18,54.79 163.38,55 163.89,55 J2.B6
EPD_3V3  (via drill 0.35)
  Top 0.3: J1.16 J1.15 | Q2.2 C7.1 88.36,56.86 84.5,53 78.5,53 77.3,51.8 77.3,49 78.4,47.9 83.7,47.9 86.1,45.5 86.1,38.8 L1.2 EPD_3V3.TP 84,23.1 87.87,19.23 96.33,19.23 96.36,19.2 96.7,19.2 97.3,18.6 v97.3,15.8 | EPD_C5.2 75.56,18.74 76.6,17.7 82.7,17.7 83.85,16.55 J1.15 | v97.3,13.9 96.6,13.2 93.3,13.2 92.6,13.9 84.2,13.9 83.85,14.25 J1.15
  Bottom 0.3: v97.3,15.8 v97.3,13.9
EPD_3V3_C
  Top 0.3: Q2.1 91.03,57.67 64.83,57.67 61.02,61.48 54.88,61.48 EPD_3V3_C.TP 53.8,60.56 39.96,74.4 32.7,74.4 28.4,78.7 28.4,87.5 27.7,88.2 18.4,88.2 17.13,86.93 17.13,84.63 16.4,83.9 13.4,83.9 12.5,83 12.5,74.2 15.12,71.58 20.53,71.58 21.8,70.32 21.8,68.9 21.4,68.5 20.25,68.5 | R_CL1.1 20.25,68.5 | 20.25,68.5 20.25,64.77 U2.18
EPD_BUSY  (via drill 0.35)
  Top 0.152: J1.9 86.85,18.25 64.35,40.75 64.35,54.45 EPD_BUSY.TP 55.8,60.2 54.7,59.1 53.3,59.1 46.8,65.6 v46.7,65.6 | v44.6,65.6 32.8,65.6 v32.7,65.5 | v30.3,66 24.7,66 v24.6,65.9 | v14.2,66 11,66 10.42,65.42 U2.26
  Bottom 0.152: v46.7,65.6 v44.6,65.6 | v32.7,65.5 32.2,66 v30.3,66 | v24.6,65.9 14.3,65.9 v14.2,66
EPD_CS  (via drill 0.35)
  Top 0.152: D6.2 22.12,42.42 21.62,42.92 21.05,42.92 R9.1 20.4,42.27 20.4,42.9 20.3,43 20.3,44.1 20.58,44.38 U2.11 20.58,47.38 21.09,47.89 26.71,47.89 27.9,46.7 v28.8,46.7 | J1.12 85.3,15.37 85.3,18.3 63.5,40.1 63.5,50.73 v63.33,50.9 | v61.9,51.6 EPD_CS.TP 55.71,47.31 53.41,47.31 52.8,46.7 v33.7,46.7
  Bottom 0.152: v28.8,46.7 v33.7,46.7 | v63.33,50.9 62.6,50.9 v61.9,51.6
EPD_DC  (via drill 0.35)
  Top 0.152: v46.8,59.5 47.77,59.5 EDC_11.TP 49.57,60.43 54.6,55.4 62.4,55.4 63.79,54.01 63.79,40.51 85.85,18.45 J1.11 | v13.9,51.3 14,51.2 31.7,51.2 39.35,58.85 v39.4,58.85 | v11.9,49.3 12.96,48.24 U2.5
  Bottom 0.152: v46.8,59.5 46.2,58.9 39.45,58.9 v39.4,58.85 | v13.9,51.3 v11.9,49.3
EPD_RST  (via drill 0.35)
  Top 0.152: J1.10 86.3,15.37 86.3,18.4 64.07,40.63 64.07,54.13 61.6,56.6 EPD_RST.TP 54.23,56.6 49.13,61.7 47.5,61.7 v46.7,60.9 | v38.1,59.3 36.3,59.3 34.7,60.9 v13.7,60.9 | v15.2,62.6 16.77,64.17 U2.21
  Bottom 0.152: v46.7,60.9 45.1,59.3 v38.1,59.3 | v13.7,60.9 13.7,61.1 v15.2,62.6
FLASH_CS  (via drill 0.35)
  Top 0.152: U1.1 5.33,31.69 6.11,30.92 6.11,30.31 5.7,29.9 4.7,29.9 3.1,28.3 3.1,26.6 3.6,26.1 13.1,26.1 15.3,28.3 15.3,32.6 17.1,34.4 v20.4,34.4 | U2.12 21.85,44.45 22.3,44 23.2,44 23.92,43.28 R5.1 24.06,42.4 D9.2 27.3,42.4 27.8,41.9 27.8,38 26.1,36.3 v24.9,36.3
  Bottom 0.152: v20.4,34.4 22.2,34.4 24.1,36.3 v24.9,36.3
GDR
  Top 0.152: J1.2 90.35,15.66 90.62,15.92 91.08,15.92 92.11,14.9 158.92,14.9 Q3.1 161.52,15.08 162.2,14.4 R4.2
GND  (via drill 0.35)
  Top 0.152: C4_USB.2 152.4,61.1 152,60.7 152,59.1 152.6,58.5 154,58.5 154.5,58 154.5,57.1 154.17,56.77 D1.2 152.53,56.77 151.6,55.84 151.6,54.8 151.8,54.6 v152.1,54.6 | SJ1.1 165.1,11.15 R2.1 165.05,11.2 162.7,11.2 160.9,13 R4.1 | 58.29,103.59 58.29,104.19 58.3,104.2 57.8,104.7 56.7,104.7 55.87,105.53 55.49,105.53 54.5,104.54 54.5,103.9 | C_DELAY.2 53.38,98.42 53.1,98.7 53.1,100.6 53.5,101 54.2,101 54.5,101.3 54.5,103.9 | 47.11,107.86 RESET_BUTTON.1 | SENSOR2.7 20.87,77.87 20.4,77.4 20.4,77.2 20.27,77.07 SENSOR2.1 18.17,77.07 v18,76.9 | 22.6,41.6 24.9,41.6 25.2,41.3 25.2,41.1 25.4,40.9 D9.1 26.46,37.66 25.8,37 24.8,37 24.2,36.4 24.2,35.9 24.5,35.6 26.4,35.6 28.3,37.5 28.3,40.7 v30.9,43.3 | 22.6,41.6 17.83,41.6 D11.1 | 22.6,41.6 22.12,41.12 D6.1 22.12,36.72 v22.1,36.7 | 10.6,41.6 12,41.6 12.3,41.3 12.3,41 12.51,40.79 D10.1 13.35,37.36 v13.3,37.3 | 10.6,41.6 10.1,41.6 9.72,41.22 D8.1 9.72,36.44 C9.2 9.74,35.86 v10.5,35.1 | RESET_BUTTON.2 51.6,107.9 51.9,107.6 v51.9,105.9 | v51.1,104.4 54,104.4 54.5,103.9 | D11.1 16.41,42.31 v16.2,42.1 | 7.9,64.42 U2.28 | v9.7,61 10.4,61 11.5,59.9 11.5,56.5 12.35,55.65 U2.29_3 | 7.9,64.42 7.9,65 6.92,65.98 v6.92,66.56 | U2.1 7.9,46.92 v7.9,45.5 7.9,45.4 | v10.2,43.4 10.3,43.4 10.6,43.1 10.6,41.6 | v21.3,35.4 21.3,33.03 C1_BAT1.2 22.09,32.1 20.5,32.1 20.1,32.5 18.7,32.5 17.8,33.4 16.9,33.4 16.5,33 16.5,31.75 16.73,31.53 19.17,31.53 21.5,29.2 21.5,28.05 R1_PWRUSB.1 21.49,27.49 20.2,26.2 20.2,24.5 19.98,24.28 R2_BAT.1 | TP5.TP 46.4,55.5 46.4,53.7 43.1,50.4 v35.9,50.4 | 21.95,107.9 BOOT_BUTTON.1 22.25,107.45 | U2.29_5 U2.29_8 | v18,75.4 18,74.8 18.48,74.32 U4.6
  Top 0.152: D12.1 8.98,69.15 | 8.98,69.15 7.7,67.87 v7.7,67.1 | 26.96,25.8 IC4.2 | J2.A12 163.95,57.5 | 163.95,57.5 J2.B1 | 161.38,54.32 R2-USB1.1 | J2.MP4 161.32,59.42 159.7,57.8 159.7,55.7 160.2,55.2 161.21,55.2 161.67,55.67 161.67,55.69 163.48,57.5 163.95,57.5 | J2.A1 163.95,49.78 J2.MP3 v166,49.2 | v168.5,47.6 168.46,47.64 J2.MP1 | v2.53,94.06 2.53,95.15 J4.G4 2.33,95.03 1.4,94.1 1.4,89.9 v3.2,88.1 | v3.74,91.88 4.36,92.5 J4.P6 13.98,92.5 J4.G2 15,90.9 14,89.9 11.9,89.9 6.7,84.7 6.7,72.8 8,71.5 9.39,71.5 11.38,69.51 13.91,69.51 14.49,70.09 19.27,70.09 19.6,70.42 19.6,70.7 19.1,71.2 14.8,71.2 11.9,74.1 11.9,83.7 13.4,85.2 J4.G1 15.69,85.31 | C6.2 19.1,106.39 2.28,106.39 0.63,104.74 0.63,86.21 3.39,83.45 3.39,66.8 3.59,66.6 3.9,66.6 4.3,67 4.3,71.7 4.6,72 5.2,72 6.5,70.7 7.4,70.7 7.7,70.4 7.7,69.6 8.15,69.15 8.98,69.15 | 7.9,64.42 7.9,61.6 v8.5,61 | TP5.TP GND.TP | C2.2 18.58,86.88 v18,86.3 | v16.6,86.2 16.58,86.2 15.69,85.31 | C10.2 59.62,106.42 v59.2,106 | v59.2,104.5 58.29,103.59 | 58.29,103.59 IC1.3 | C3.- 159,25.98 159,22.7 v162,19.7 | v162.4,18.1 162.9,17.6 165.05,17.6 J3.1 | 13.97,21.08 MCP73831.2 | EPD_C12.2 57.48,20.42 56.6,21.3 56.6,44.4 54.6,46.4 34.2,46.4 33.4,45.6 v33.4,43.5 | 30.9,43.2 v30.9,43.3 | 16,85 15.69,85.31 | v1.25,83.85 1.2,83.8 1.2,82.33 J4.G3 | v10.5,33.7 10.5,31.28 U1.9 | v31.4,50.2 31.4,43.8 v30.9,43.3 | v24,79.8 23.69,79.49 SENSOR2.5 | C2_BAT.2 11.4,21.03 11.4,19.5 v12.6,18.3 | TP5.TP 47.5,56 v48.8,54.7 | D11.1 15.73,43.7 v15.7,43.7 | v13.3,43.7 v12.4,43.7
  Bottom 0.152: v51.1,104.4 51.9,105.2 v51.9,105.9 | v16.2,42.1 16.2,40.2 v13.3,37.3 | v9.7,61 v8.5,61 | v7.9,45.5 7.9,44.7 8.75,43.85 | 8.75,43.85 9.2,43.4 v10.2,43.4 | v22.1,36.7 22.1,36.2 v21.3,35.4 | v18,76.9 v18,75.4 | v166,49.2 167.6,47.6 v168.5,47.6 | v2.53,94.06 3.74,92.85 v3.74,91.88 | v18,86.3 17.9,86.2 17.6,86.2 | 17.6,86.2 v16.6,86.2 | v59.2,106 v59.2,104.5 | v162,19.7 162.4,19.3 v162.4,18.1 | v33.4,43.5 33.2,43.3 v30.9,43.3 | v3.2,88.1 3.2,85.7 1.3,83.8 v1.25,83.85 | v10.5,35.1 v10.5,33.7 | v7.7,67.1 7.46,67.1 v6.92,66.56 | v35.9,50.4 31.6,50.4 v31.4,50.2 | 17.6,86.2 v24,79.8 | v152.1,54.6 155.3,54.6 | 155.3,54.6 157.6,54.6 v158.2,55.2 | 155.3,54.6 155.8,54.1 v155.8,52.9 | v12.6,18.3 12.7,18.2 v12.7,13 | v48.8,54.7 50.1,54.7 v51.3,53.5 | v15.7,43.7 v13.3,43.7 | v12.4,43.7 11.7,44.4 v11.5,44.4 | 8.75,43.85 9.25,43.85 v9.7,44.3
  pour Top: 75.86,10.16 75.88,10.18 94.32,10.18 94.34,10.16 94.36,10.14 94.38,10.12 94.38,0.18 170.02,0.18 170.02,67.02 92.08,67.02 92.06,67.04 92.04,67.06 92.02,67.08 92.02,111.02 67.38,111.02 67.38,110.08 67.36,110.06 67.34,110.04 67.32,110.02 20.18,110.02 20.16,110.04 20.14,110.06 20.12,110.08 20.12,111.02 0.18,111.02 0.18,64.88 6.62,64.88 6.64,64.86 6.66,64.84 6.68,64.82 6.68,46.48 6.66,46.46 6.64,46.44 6.62,46.42 0.18,46.42 0.18,0.18 75.82,0.18 75.82,10.12 75.84,10.14
  pour Top: 167.64,6.84 167.62,6.82 97.68,6.82 97.66,6.84 94.47,10.02 94.38,10.02 94.38,0.18 170.02,0.18 170.02,21.32 167.98,21.32 167.98,15.83 169.16,14.64 169.18,14.62 169.18,8.38 169.16,8.36
  pour Top: 67.32,110.02 67.32,110.02 20.18,110.02 20.16,110.04 20.14,110.06 20.12,110.08 20.12,111.02 0.18,111.02 0.18,81.38 2.37,81.38 2.46,81.46 2.48,81.48 2.72,81.48 2.72,83.37 0.24,85.86 0.22,85.88 0.22,105.02 0.24,105.04 2.96,107.76 2.98,107.78 18.97,107.78 19.42,108.23 19.42,109.52 19.44,109.54 19.46,109.56 19.48,109.58 20.52,109.58 20.54,109.56 20.56,109.54 20.58,109.52 20.58,108.78 21.37,108.78 21.42,108.83 21.42,109.92 21.44,109.94 21.46,109.96 21.48,109.98 23.02,109.98 23.04,109.96 23.06,109.94 23.08,109.92 23.08,109.58 24.92,109.58 24.92,109.92 24.94,109.94 24.96,109.96 24.98,109.98 26.52,109.98 26.54,109.96 26.56,109.94 26.58,109.92 26.58,109.33 28.23,107.68 29.32,107.68 29.34,107.66 29.36,107.64 29.38,107.62 29.38,106.28 42.37,106.28 43.62,107.53 43.62,108.62 43.64,108.64 44.06,109.06 44.08,109.08 44.52,109.08 44.52,109.82 44.54,109.84 44.56,109.86 44.58,109.88 45.72,109.88 45.74,109.86 45.76,109.84 45.78,109.82 45.78,109.18 46.32,109.18 46.32,109.92 46.34,109.94 46.36,109.96 46.38,109.98 47.92,109.98 47.94,109.96 47.96,109.94 47.98,109.92 47.98,109.58 49.87,109.58 50.26,109.96 50.28,109.98 67.27,109.98
  pour Top: 64.46,54.54 64.48,54.52 64.48,54.18 84.27,54.18 86.82,56.73 86.82,57.12 86.84,57.14 86.86,57.16 86.88,57.18 86.97,57.18 87.06,57.26 87.08,57.28 87.17,57.28 87.32,57.42 64.78,57.42 64.76,57.44 60.97,61.22 58.98,61.22 59.03,61.18 59.12,61.18 59.14,61.16 59.56,60.74 59.58,60.72 59.58,60.63 59.66,60.54 59.68,60.52 59.68,59.88 59.66,59.86 59.58,59.77 59.58,59.68 59.56,59.66 59.48,59.57 59.48,59.53
  pour Top: 95.53,18.12 93.74,16.34 93.72,16.32 91.68,16.32 92.53,15.48 97.02,15.48 97.02,15.52 96.98,15.52 96.96,15.54 96.94,15.56 96.92,15.58 96.92,16.02 96.94,16.04 96.96,16.06 96.98,16.08 97.02,16.08 97.02,18.57 96.67,18.92 96.38,18.92 96.38,18.18 96.36,18.16 96.34,18.14 96.32,18.12
  pour Top: 92.93,18.12 91.68,16.88 93.22,16.88 93.24,16.86 93.26,16.84 93.28,16.82 93.28,16.68 93.57,16.68 95.12,18.23 95.12,18.92 93.78,18.92 93.78,18.18 93.76,18.16 93.74,18.14 93.72,18.12
  pour Top: 7.48,84.67 7.48,81.98 14.72,89.22 12.03,89.22
  pour Top: 16.96,91.94 16.98,91.92 16.98,89.98 16.98,89.98 17.02,90.03 17.02,93.87 15.57,95.32 5.68,95.32 5.66,95.34 4.64,96.36 4.62,96.38 4.62,103.12 4.64,103.14 6.26,104.76 6.28,104.78 29.32,104.78 29.32,104.93 29.32,104.92 28.18,104.92 28.16,104.94 28.14,104.96 28.12,104.98 28.12,105.12 6.13,105.12 4.38,103.37 4.38,95.18 6.02,95.18 6.04,95.16 6.06,95.14 6.08,95.12 6.08,93.78 13.62,93.78 13.64,93.76 13.66,93.74 13.68,93.72 13.68,93.63 15.03,92.28 16.62,92.28 16.64,92.26
  pour Top: 88.66,50.16 88.64,50.14 88.62,50.12 88.38,50.12 88.38,48.63 90.03,46.98 90.72,46.98 90.72,47.07 89.34,48.46 89.32,48.48 89.32,50.12 89.18,50.12 89.16,50.14 89.14,50.16 89.12,50.18 89.12,52.32 89.14,52.34 89.26,52.46 89.28,52.48 90.47,52.48 90.52,52.52 88.93,52.52 88.68,52.27 88.68,50.18
  pour Bottom: 6.66,46.46 6.64,46.44 6.62,46.42 0.18,46.42 0.18,0.18 75.82,0.18 75.82,10.12 75.84,10.14 75.86,10.16 75.88,10.18 94.32,10.18 94.34,10.16 94.36,10.14 94.38,10.12 94.38,0.18 170.02,0.18 170.02,67.02 92.08,67.02 92.06,67.04 92.04,67.06 92.02,67.08 92.02,111.02 67.38,111.02 67.38,110.08 67.36,110.06 67.34,110.04 67.32,110.02 20.18,110.02 20.16,110.04 20.14,110.06 20.12,110.08 20.12,111.02 0.18,111.02 0.18,64.88 6.62,64.88 6.64,64.86 6.66,64.84 6.68,64.82 6.68,46.48
GPIO8
  Top 0.152: U2.10 19.31,44.61 18.9,44.2 18.9,42.23 R1.1
I2C_PW
  Top 0.3: SENSOR2.2 17.87,77.87 17.3,77.3 17.3,76.7 18,76 22.3,76 22.85,76.55 | 22.85,76.55 23,76.7 23.3,77 23.9,77.6 | C1.1 C2.1 23.68,85.58 23.5,85.4 23.5,84.2 | U2.17 21.85,66.8 22.23,67.17 22.23,70.67 20.89,72.01 15.39,72.01 13,74.4 13,82.7 13.7,83.4 22.7,83.4 23.5,84.2 | 21.93,77.07 SENSOR2.8 22.33,77.07 22.85,76.55 | 23.5,84.2 23.5,83.8 23.9,83.4 R2-PINH.2 26.77,83.4 R1_PINH.2 27.52,83.38 27.8,83.1 27.8,81.5 23.9,77.6 | SENSOR2.6 22.83,78.67 23.9,77.6
INT_RTC  (via drill 0.35)
  Top 0.152: v33.4,47.6 51.8,47.6 55.6,51.4 INT_RTC.TP 58.18,54.28 v58.3,54.28 | v30.5,47.6 29.7,48.4 17.6,48.4 16.77,47.57 U2.8 | R1_PINH1.1 87.02,60.63 U3.3 86.99,59 v86.3,58.3 | v64.9,54.5 65.1,54.7 83.4,54.7 v85.5,56.8
  Bottom 0.152: v33.4,47.6 v30.5,47.6 | v86.3,58.3 86.3,57.6 v85.5,56.8 | v64.9,54.5 64.8,54.4 58.42,54.4 v58.3,54.28
IO/BOOT  (via drill 0.35)
  Top 0.152: 25.96,109.7 28.64,107.02 28.64,106.8 R_BOOT.1 | 25.96,109.7 25.75,109.7 BOOT_BUTTON.3 | 25.96,109.7 26.11,109.7 25.81,109.4 BOOT_BUTTON.4 21.48,108.63 21.47,108.63 21.42,108.58 C6.1 19.01,107.6 3,107.6 0.35,104.95 0.35,85.92 2.86,83.4 2.86,76.13 v2.6,75.87 | v7.8,75.1 7.9,75.1 8.7,74.3 8.7,73.8 9.85,72.65 12.21,72.65 14.3,70.55 v18.99,70.55 v19,70.55 | v22.7,66.9 24.39,65.21 U2.15
  Bottom 0.152: v2.6,75.87 3.37,75.1 v7.8,75.1 | v22.7,66.9 20,66.9 19.5,67.4 19.5,69.9 19,70.4 v19,70.55
IO/CHANGE  (via drill 0.35)
  Top 0.152: 65.7,109.7 62.2,109.7 CHANGE_BUTTON.4 60.46,109.4 C10.1 58.54,108.56 v58.5,108.6 | R_CHANGE.1 66.88,108.54 65.72,109.7 65.7,109.7 | CHANGE_BUTTON.3 65.7,109.7 | v52.5,103.8 50.7,103.8 49.9,104.6 6.3,104.6 4.8,103.1 4.8,96.4 5.7,95.5 15.62,95.5 17.22,93.89 17.22,89.98 16.4,89.15 14.9,89.15 7.54,81.79 7.54,76.16 9,74.7 9,73.9 9.7,73.2 11.4,73.2 v11.5,73.3 | v18.71,69.09 15.01,65.39 14.97,65.39 14.23,64.66 U2.23
  Bottom 0.152: v18.71,69.09 18.2,69.6 18.2,72.9 17.7,73.4 11.6,73.4 v11.5,73.3 | v58.5,108.6 57.8,107.9 57.8,105.4 56.8,104.4 53.1,104.4 v52.5,103.8
MISO  (via drill 0.35)
  Top 0.152: 9.15,62.8 U2.27 9.03,64.56 9.03,65.13 | 9.15,62.8 9.15,50.35 6.75,47.95 6.75,46.55 6.7,46.5 6.7,34.7 5.6,33.6 4.6,33.6 4.1,33.1 4.1,31.88 U1.2 | MISO.TP 42.1,57 36.8,62.3 32.1,62.3 31.32,61.52 10.43,61.52 9.15,62.8 | 9.03,65.13 D12.2 11.39,67.7 R8.1 | 9.03,65.13 7.11,67.04 7.11,69.7 v7.09,69.73 | J4.P7 13.56,93.6 15.04,92.12 16.52,92.12 16.8,91.84 16.8,90.16 16.83,90.13 16.16,89.46 12.02,89.46 7.26,84.7 7.26,72.89 v7.5,72.64
  Bottom 0.152: v7.09,69.73 7.09,72.23 v7.5,72.64
MOSI  (via drill 0.35)
  Top 0.152: v17.2,36.8 17.2,40.81 D11.2 16.59,40.81 15.28,42.12 15.27,42.11 R7.1 15.17,42.93 14.9,43.2 14.9,45.1 15.5,45.7 U2.7 15.5,47.6 16.4,48.5 | v15,34.5 15,29.7 13.41,28.11 U1.5 | 16.4,48.5 16.9,49 v30.4,49 | v34.6,49 49.6,49 51.6,51 MOSI.TP 54.54,54.74 59.4,54.74 62.6,51.54 62.6,39.7 84.35,17.95 J1.14 | J4.P3 6.4,89.2 7.4,88.2 7.4,86.19 5.4,84.19 v5.4,73.4 | v13.9,48.9 12.8,50 11.03,50 v10.9,50.13 | v16,48.9 16.4,48.5 | v7.9,50.1 6.95,51.05 6.95,64.65 5.49,66.11 v5.49,70.61
  Bottom 0.152: v17.2,36.8 15,34.6 v15,34.5 | v34.6,49 v30.4,49 | v13.9,48.9 v16,48.9 | v7.9,50.1 7.93,50.13 v10.9,50.13 | v5.4,73.4 5.4,73.35 5.45,73.3 5.45,70.65 v5.49,70.61
N$1
  Top 0.152: J2.A5 165.74,53.06 166.6,52.2 166.6,47.7 165.4,46.5 160.77,46.5 159.32,47.95 159.32,52.42 159.92,53.02 R2-USB1.2
N$3
  Top 0.152: R2-USB2.1 161.18,56.1 163.19,58.11 165.39,58.11 165.8,57.7 165.8,56.4 165.46,56.06 J2.B5
N$12  (via drill 0.35)
  Top 0.152: v26.6,29.5 25.74,30.36 D2.1 25.5,30.8 25,31.3 24.4,31.3 23.53,32.17 C1_BAT1.1 | v26.6,28.17 26.6,27.05 IC4.1 26.12,26.72 25.8,26.4 25.8,24.3 | 24.49,22.31 24.47,22.31 | Q1.2 22.91,20.76 24.47,22.31 | 24.47,22.31 25.8,23.65 25.8,24.1 25.8,24.3 | IC4.3 26.91,24.8 26.3,24.8 25.8,24.3
  Bottom 0.152: v26.6,29.5 v26.6,28.17
N$17
  Top 0.152: C4.1 D3.2 93.09,34.95 94.19,36.05 94.19,38.75 93.69,39.25 90.13,39.25 89.53,38.65 D4.1
N$22
  Top 0.152: R1_BAT.1 19.42,32.08 22.61,28.89 22.61,26.28 CHG_LED.C
N$23  (via drill 0.35)
  Top 0.152: 14.1,22.08 MCP73831.1 13.41,21.99 13.1,22.3 v13.1,23.3 | R1_BAT.2 17.26,27.48 16.14,26.36 v16.1,26.36
  Bottom 0.152: v16.1,26.36 13.1,23.36 v13.1,23.3
N$25  (via drill 0.35)
  Top 0.152: MCP73831.5 16.1,22.5 v16.1,22.9 | R2_BAT.2 19.09,25.4 17.5,25.4 16.9,24.8 v16.9,24.1
  Bottom 0.152: v16.9,24.1 16.9,23.7 v16.1,22.9
N$28
  Top 0.152: EPD_C1.1 93.67,16.5 89.7,16.5 89.35,16.15 J1.4
N$29
  Top 0.152: EPD_C2.1 91.58,17 89.4,17 88.85,16.45 J1.5
N$37
  Top 0.152: EPD_C6.1 73.25,17.75 73.65,17.35 80.66,17.35 82.35,15.66 J1.18
N$38
  Top 0.152: EPD_C7.1 71.1,17.3 71.33,17.07 80.44,17.07 81.9,15.6 81.9,15.37 J1.19
N$39
  Top 0.152: EPD_C8.1 69.13,17.17 69.54,16.76 80.35,16.76 81.3,15.8 81.3,15.37 J1.20
N$41
  Top 0.152: EPD_C10.1 64.98,19.02 65.2,18.8 65.2,16.9 65.91,16.19 78.99,16.19 79,16.2 79.8,16.2 80.35,15.66 J1.22
N$43
  Top 0.152: EPD_C12.1 58.88,19.12 59.3,18.7 59.3,16.9 60.88,15.32 J1.24
N$56
  Top 0.152: C_DELAY.1 54.12,99.8 54.6,99.8 55,100.2 55,100.6 55.49,101.09 IC1.5
N$68
  Top 0.152: D7.1 R_CAPACITOR.2
PREVGH  (via drill 0.35)
  Top 0.152: EPD_C9.1 67,19.18 67.52,19.18 67.8,18.9 | 67.8,18.9 67.8,17.1 68.42,16.48 80.12,16.48 80.85,15.75 J1.21 | 67.8,18.9 67.8,22 68.4,22.6 v78,22.6 | D5.1 80.27,40.87 79.4,40 78.5,40 77.9,39.4 77.9,36.6 78.6,35.9 78.6,33.8 83.3,29.1 83.3,25.1 82.6,24.4 v82.5,24.4
  Bottom 0.152: v82.5,24.4 80.6,22.5 78.1,22.5 v78,22.6
PREVGL  (via drill 0.35)
  Top 0.152: EPD_C11.1 60.88,17.02 61.99,15.91 79.1,15.91 79.12,15.92 79.58,15.92 79.85,15.66 J1.23 79.8,15.27 v79.8,14.2 | D4.2 91.2,36.52 91.2,22.8 v88.95,20.55
  Bottom 0.152: v88.95,20.55 82.6,14.2 v79.8,14.2
RESE
  Top 0.152: R3.2 163.66,16.36 163.56,16.26 | 163.56,16.26 159.22,16.26 Q3.2 | J1.3 89.85,15.85 90.2,16.2 90.5,16.2 91.6,16.2 92.55,15.25 158.21,15.25 158.57,15.61 162.91,15.61 163.56,16.26
RESE'
  Top 0.152: R3.1 166.84,15.06 167.8,14.1 167.8,12.4 | 167.8,12.4 167.8,11.5 167.31,11.01 R2.2 | SJ1.2 167.13,13.07 167.8,12.4
RESET  (via drill 0.35)
  Top 0.152: IC1.1 57.78,101.42 56.6,102.6 56.6,104.16 v55.68,105.08 | v10.22,60.2 10.22,47.04 10.32,46.94 U2.3 | v54.37,105.93 53.07,105.93 52.4,106.6 52.4,108.1 52.84,108.54 R_RESET.1 53.44,109.16 53.2,109.4 RESET_BUTTON.3 RESET_BUTTON.4 46.71,108.96 45.27,108.96 C5.1 44.16,108.86 43.8,108.5 43.8,107.4 42.45,106.05 2.35,106.05 0.91,104.61 0.91,89.75 3.68,86.98 3.68,67.62 v3.85,67.46 v3.85,67.45
  Bottom 0.152: v55.68,105.08 55.22,105.08 v54.37,105.93 | v10.22,60.2 10.22,63.58 9.4,64.4 7.9,64.4 4.85,67.45 v3.85,67.45
RTC_RST  (via drill 0.35)
  Top 0.152: U3.4 85.72,65.08 85,65.8 66.2,65.8 63.6,68.4 47.3,68.4 v45.5,70.2 | v43.4,68.5 33.9,68.5 28.59,63.19 23.61,63.19 23,63.8 23,64.32 U2.16
  Bottom 0.152: v45.5,70.2 43.8,68.5 v43.4,68.5
RX
  Top 0.152: RX.TP 43.8,60.7 43.8,61.5 42.2,63.1 31.5,63.1 30.5,62.1 14.4,62.1 12.96,63.54 U2.24
SCK  (via drill 0.35)
  Top 0.152: U1.6 13.53,29.38 14.4,30.24 v14.4,32.4 | v35.2,49.7 46.6,49.7 48.1,51.2 SCK.TP 48.1,52.4 50.72,55.02 62.38,55.02 62.88,54.52 62.88,40.02 84.9,18 84.9,15.37 J1.13 | J4.P5 6.6,91.4 7.8,90.2 7.8,86.2 5.9,84.3 5.9,72.81 v6.25,72.46 | v30.2,49.8 16.26,49.8 | v11.21,50.71 v11.22,50.7 15.36,50.7 16.26,49.8 | v13.3,35.9 14.4,37 14.4,41.8 13.9,42.3 D10.2 11.47,42.29 R6.1 11.5,42.2 11.5,43.44 14.23,46.17 U2.6 14.2,46.97 14.2,48.5 15.5,49.8 16.26,49.8 | v8.5,50.7 7.23,51.97 7.23,65.25 6.47,66.01 6.47,70 v6.58,70.12
  Bottom 0.152: v14.4,32.4 13.3,33.5 v13.3,35.9 | v35.2,49.7 30.4,49.7 30.3,49.8 v30.2,49.8 | v8.5,50.7 v11.2,50.7 v11.21,50.71 | v6.58,70.12 6.58,70.86 6.25,71.2 v6.25,72.46
SCL  (via drill 0.35)
  Top 0.152: U4.7 18.41,73.82 17.35,74.88 16.38,74.88 15.8,74.3 | 15.8,74.3 15.8,74.1 16.8,73.1 v16.8,72.8 | v160.15,23.95 163.39,20.71 165.16,20.71 J3.4 | v156.3,24 156.2,23.9 146,23.9 122.7,47.2 90.9,47.2 89.5,48.6 89.5,51.26 U3.16 90.64,52.4 100.5,52.4 102.1,54 v102.1,61.7 | v102.5,64.2 100.2,66.5 v87.7,66.5 | v86,66.5 66.5,66.5 63.8,69.2 47.65,69.2 v47.6,69.25 | 15.8,74.3 15.8,77.6 17.67,79.47 SENSOR2.4 19.62,80.19 19.62,80.62 20.2,81.2 23.52,81.2 R2-PINH.1 | v18.12,67.58 18.04,67.5 U2.20 18.04,63.16 18.68,62.52 28.82,62.52 33.79,67.5 45,67.5 v45.1,67.6
  Bottom 0.152: v16.8,72.8 17.3,72.3 17.3,68.4 v18.12,67.58 | v160.15,23.95 160.1,24 v156.3,24 | v102.5,64.2 102.1,63.8 v102.1,61.7 | v87.7,66.5 v86,66.5 | v47.6,69.25 47.55,69.2 46.8,69.2 45.2,67.6 v45.1,67.6
SDA  (via drill 0.35)
  Top 0.152: v16.6,75.7 16.6,77.9 17.3,78.6 18.83,78.6 SENSOR2.3 19.27,78.67 21.09,80.49 25.2,80.49 R1_PINH.1 | v159.5,23.3 163,19.8 J3.3 | v157.2,23.4 146,23.4 122.6,46.8 89.9,46.8 88.2,48.5 88.2,51.23 U3.15 88.27,52.07 88.9,52.7 100.3,52.7 101.6,54 v101.6,62.5 | v17.5,72.8 17.59,72.8 17.81,73.02 19.11,73.02 U4.8 19.39,73.3 18.54,73.3 17.64,74.2 v17,74.2 | v18.83,68 18.83,65.87 19.31,65.39 19.31,64.8 | v101.6,64.1 101.6,64.6 100,66.2 88.3,66.2 v87.8,65.7 | v86.1,65.7 85.6,66.2 66.4,66.2 63.8,68.8 47.41,68.8 46.67,69.54 v46.67,69.67 | 19.31,64.8 U2.19 | 19.31,64.8 19.3,64.79 19.3,63.3 19.8,62.8 28.7,62.8 33.9,68 44.5,68 v44.6,68.1
  Bottom 0.152: v16.6,75.7 16.6,74.6 v17,74.2 | v159.5,23.3 159.4,23.4 v157.2,23.4 | v101.6,62.5 v101.6,64.1 | v87.8,65.7 v86.1,65.7 | v17.5,72.8 17.5,72.5 17.58,72.42 17.58,69.25 v18.83,68 | v44.6,68.1 45.1,68.1 v46.67,69.67
SRC  (via drill 0.35)
  Top 0.152: L1.1 79.1,36.7 78.4,37.4 78.4,39.3 78.8,39.7 83.4,39.7 83.77,40.07 D5.2 85.15,42.35 v85.2,42.4 | Q3.3 156.8,15.53 102.97,15.53 99.59,18.91 99.59,34.49 98.94,35.15 C4.2 97,37.3 97,40.2 94.8,42.4 v87.2,42.4
  Bottom 0.152: v85.2,42.4 v87.2,42.4
SS_SD  (via drill 0.35)
  Top 0.152: R10.1 8.65,42.9 9.12,42.9 D8.2 9.72,43.56 11.69,45.53 U2.4 11.69,48.41 10.87,49.23 v10.87,49.5 | J4.P2 5.68,88 6.5,88 7.1,87.4 7.1,86.3 4.9,84.1 v4.9,74.2 | v4.99,71.45 4.65,71.1 v4.65,66.15
  Bottom 0.152: v4.9,74.2 4.95,74.15 4.95,71.5 v4.99,71.45 | v4.65,66.15 5.44,66.15 8,63.6 8,51.3 7.5,50.8 7.5,50.4 6.9,49.8 6.9,49.4 7.3,49 10.37,49 v10.87,49.5
TX
  Top 0.152: TX.TP 40.85,60.65 38.8,62.7 31.8,62.7 30.9,61.8 13.47,61.8 11.69,63.58 U2.25
USB_D+  (via drill 0.35)
  Top 0.152: D1.1 152.62,57.72 151.12,56.22 151.12,47.88 163.57,35.43 v163.57,22.2 | v30.8,46.1 25.23,46.1 U2.14 | v162.47,8.61 97.69,8.61 94.3,12 58.59,12 55.9,14.7 55.9,44.4 54.28,46.02 34.77,46.02 v34.7,45.95
  Bottom 0.152: v162.47,8.61 163.57,9.71 v163.57,22.2 | v34.7,45.95 34.55,46.1 v30.8,46.1
USB_D-  (via drill 0.35)
  Top 0.152: D1.3 153.57,54.82 151.5,52.75 151.5,48 164,35.5 164,23.1 v164.1,23 | v33.9,45.4 54.3,45.4 55.62,44.08 55.62,14.58 58.6,11.6 94.31,11.6 97.85,8.05 162.75,8.05 v163.8,9.1 | v30.7,45.3 23.8,45.3 23.12,45.98 U2.13
  Bottom 0.152: v164.1,23 164.1,9.4 v163.8,9.1 | v33.9,45.4 30.8,45.4 v30.7,45.3
VBAT
  Top 0.3: 23.5,20.1 25,21.6 Q1.3 29.71,21.71 32.6,24.6 32.6,48.4 35.5,51.3 42.1,51.3 45.63,54.83 45.63,68.13 39.93,73.82 23.4,73.82 | 23.5,20.1 22.2,18.8 15.3,18.8 MCP73831.3 13.11,20.09 12.72,20.48 C2_BAT.1 | 23.4,73.82 U4.2 | U4.3 22.9,74.32 23.4,73.82 | VBAT.TP 23.5,20.1
VBUS
  Top 0.3: 154.9,56 154.9,51.48 PFMF.050.1.2 167.63,38.75 167.63,15.8 168.9,14.53 168.9,8.5 167.5,7.1 97.7,7.1 94.38,10.43 12.37,10.43 9.5,13.3 9.5,18.1 | 154.9,56 155.67,56.77 D1.5 | Q1.1 22.28,23.28 CHG_LED.A | CHG_LED.A 23.36,25.53 R1_PWRUSB.2 23.36,30.32 D2.2 | C4_USB.1 C5_USB.1 155.46,58.46 154.9,57.9 154.9,56 | 9.5,18.1 9.5,24.8 10.03,25.33 14.59,25.33 C1_BAT.1 | VBUS.TP 9.5,18.1 | 16.61,20.25 MCP73831.4 17.99,20.09 18,20.1 18.75,20.1 19.34,20.69 C1_BAT.1 | CHG_LED.A 20.61,22.79 20.61,21.12 20.08,20.58 C1_BAT.1
VRTC
  Top 0.152: R_CAPACITOR.1 97.31,59.08
  Top 0.3: U3.14 86.99,52.5 88,53.5 97.6,53.5 98.32,54.22 C10_SUPERCAP.2 98.32,56.8 C8.1 97.31,59.08
VUSB
  Top 0.3: PFMF.050.1.1 161.72,50.15 162.24,50.66 162.24,51.24 162.74,51.74 162.74,52.4 | 162.74,52.4 162.74,56.14 163.16,56.56 J2.B4 J2.A9 | J2.A4 163.85,51.9 | 163.85,51.9 J2.B9 | 162.74,52.4 163.24,51.9 163.85,51.9